# EAGLE board walter (EAGLE 9.6.2)
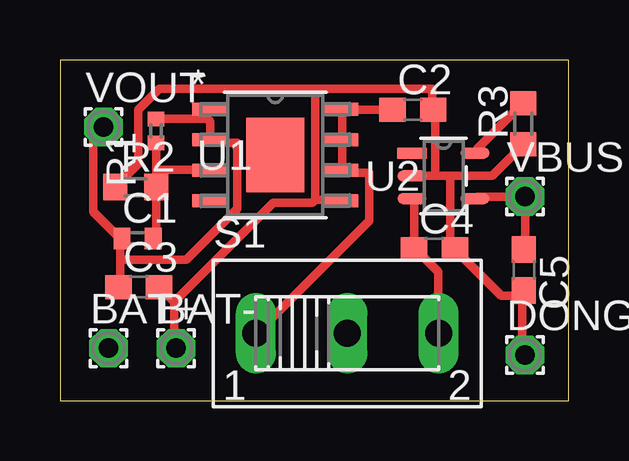
[diagram p0: board, top side]
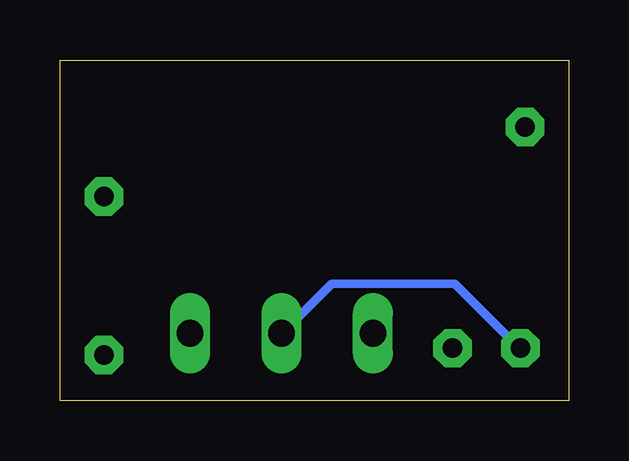
[diagram p1: board, bottom side, seen from below]

Size 21.2 x 14.2 mm. Coordinates in mm from the lower left corner, seen from the top.
Outline: 0,0 21.2,0 21.2,14.2 0,14.2 0,0
Copper layers (1*16): Top 0.035mm / dielectric 1.5mm / Bottom 0.035mm
Design rules "default": minimum track width 6mil, minimum drill 0.35mm, track to track 6mil, track to pad 6mil, pad to pad 6mil, via to via 6mil, smd to smd 6mil, copper to edge 40mil, drill to drill 6mil, minimum pad ring 10mil, minimum via ring 8mil, stop-mask expansion 4mil, vias tented up to drill 0mil, thermal gap 10mil
Net classes: 0 default: width 0.356 mm

## Footprints (pad centres in the part's own frame; a part is rotated, then mirrored left to right if it is on the bottom)
1,6/0,8 = drill 0.813 pad 1.6 octagon: 1 0,0
C0402 = smd 0.7 x 0.9: 1 -0.65,0; 2 0.65,0
C0603 = smd 1.1 x 1: 1 -0.85,0; 2 0.85,0
R0402 = smd 0.6 x 0.7: 1 -0.5,0; 2 0.5,0
R0603 = smd 1 x 1.1: 1 -0.85,0; 2 0.85,0
255SB = drill 1.118 long: 1 -3.81,0; 2 0,0; 3 3.81,0
MRA08B_TEX = smd 1.46 x 0.533: 1 -2.724,1.905; 2 -2.724,0.635; 3 -2.724,-0.635; 4 -2.724,-1.905; 5 2.724,-1.905; 6 2.724,-0.635; 7 2.724,0.635; 8 2.724,1.905 | smd 2.413 x 3.099: 9 0,0
S_5_ADI = smd 1.219 x 0.457: 1 -1.31,0.95; 2 -1.31,0; 3 -1.31,-0.95; 4 1.31,-0.95; 5 1.31,0.95

## Placement (x,y rotation side)
BAT+  [1,6/0,8]  2.02,2.19 0 top
BAT-  [1,6/0,8]  4.84,2.19 0 top
C1  2700pF  [C0402]  3.23,6.77 0 top
C2  10uF  [C0603]  14.7,12.12 0 top
C3  10uF  [C0603]  3.28,4.73 0 top
C4  4.1uF  [C0603]  15.6,6.32 0 top
C5  4.6uF  [C0603]  19.32,5.45 270 top
DONGLEGND  [1,6/0,8]  19.37,1.91 0 top
R1  2K  [R0402]  4,11.25 90 top
R2  357  [R0603]  3.16,8.9 0 top
R3  2.2K  [R0603]  19.3,11.54 90 top
S1  [255SB]  11.97,2.81 0 top
U1  LP38511MRX-ADJ/NOPB  [MRA08B_TEX]  8.97,10.24 0 top
U2  LTC4054LES5-4.2TRPBF  [S_5_ADI]  15.98,9.37 0 top
VBUS  [1,6/0,8]  19.37,8.51 0 top
VOUT  [1,6/0,8]  1.82,11.41 0 top

## Library data of the parts
BAT+ BAT- DONGLEGND VBUS VOUT = wirepad
C1-C5 = rcl; SPICEPREFIX: C
R1-R3 = rcl; SPICEPREFIX: R
S1 = switch
U1 = LP38511MRX-ADJ:NOPB; BUILT_BY: EMA_UL_Team; MANUFACTURER_PART_NUMBER: LP38511MRX-ADJ/NOPB; SOURCELIBRARY: National_2014-06-20; VENDOR: Texas Instruments
U2 = LTC4054; BUILT_BY: EMA_Jessica; COPYRIGHT: Copyright (C) 2016 Accelerated Designs. All rights reserved; MANUFACTURER_PART_NUMBER: LTC4054LES5-4.2#TRPBF; SOURCELIBRARY: Analog_Devices_2018-09-28; VENDOR: Analog Devices Inc

## Nets
GND: BAT-.1 C2.2 C3.2 C4.2 C5.2 DONGLEGND.1 R2.1 R3.1 U1.5 U2.2
N$1: C2.1 S1.1 U1.6 U1.7 U1.8
N$2: C4.1 S1.3 U2.3
N$3: C1.1 C3.1 R1.2 U1.1 U1.2 VOUT.1
N$4: C1.2 R1.1 R2.2 U1.3
N$5: BAT+.1 S1.2
N$6: R3.2 U2.5
N$7: C5.1 U2.4 VBUS.1

## Tracks (layer width: path | path; a pad name or v marks a point on that pad's centre or on a via)
GND
  Top 0.356: DONGLEGND.1 19.25,2 19.25,4.25 C5.2 19.25,4.5 19.25,4.38 18.38,4.38 16.5,6.25 C4.2 16.38,6.38 16.25,6.5 16.25,9.38 | 4.75,4.12 4.25,4.62 C3.2 | 4.75,4.12 4.75,2.25 BAT-.1 | 15.62,9.38 14.75,9.38 U2.2 | 15.62,9.38 16.25,9.38 | 16.25,9.38 18,9.38 19.25,10.62 R3.1 | 10.62,13 15.5,13 15.5,12.12 C2.2 15.62,12 15.62,9.38 | 10.62,13 4.12,13 3.25,12.12 3.25,9.88 2.38,9 R2.1 | 10.62,8.38 11.62,8.38 U1.5 | 10.62,13 10.62,8.38 | 4.75,4.12 8.88,8.25 10.5,8.25 10.62,8.38
N$1
  Top 0.356: C2.1 13.75,12.12 11.75,12.12 U1.8 11.75,12 11.75,11 U1.7 11.75,10.88 11.75,9.62 U1.6 11.88,9.5 12.88,9.5 12.88,7.5 8.25,2.88 S1.1
N$2
  Top 0.356: U2.3 14.75,8.38 C4.1 14.88,6.25 15.75,5.38 15.75,2.88 S1.3
N$3
  Top 0.356: 6.12,11.75 R1.2 | 6.12,11.75 6.12,12.12 U1.1 | 6.12,11.75 6.25,11.62 U1.2 6.38,10.75 7.38,10.75 7.38,8 5.25,5.88 2.5,5.88 | 2.5,5.88 2.5,4.75 C3.1 | 2.5,5.88 2.5,6.75 C1.1 2.38,6.88 1.38,7.88 1.38,11 1.75,11.38 VOUT.1
N$4
  Top 0.356: 4,9.62 4,9 R2.2 4,8.75 4,6.88 C1.2 | 4,9.62 R1.1 | 4,9.62 6.12,9.62 U1.3
N$5
  Bottom 0.356: BAT+.1 2.12,2.25 4.75,4.88 9.88,4.88 11.88,2.88 S1.2
N$6
  Top 0.356: R3.2 19.25,12.38 17.38,10.5 17.38,10.38 U2.5
N$7
  Top 0.356: C5.1 19.38,6.38 VBUS.1 19.25,8.5 17.38,8.5 U2.4